# EAGLE board panel (EAGLE 5.11), part 1 of 2
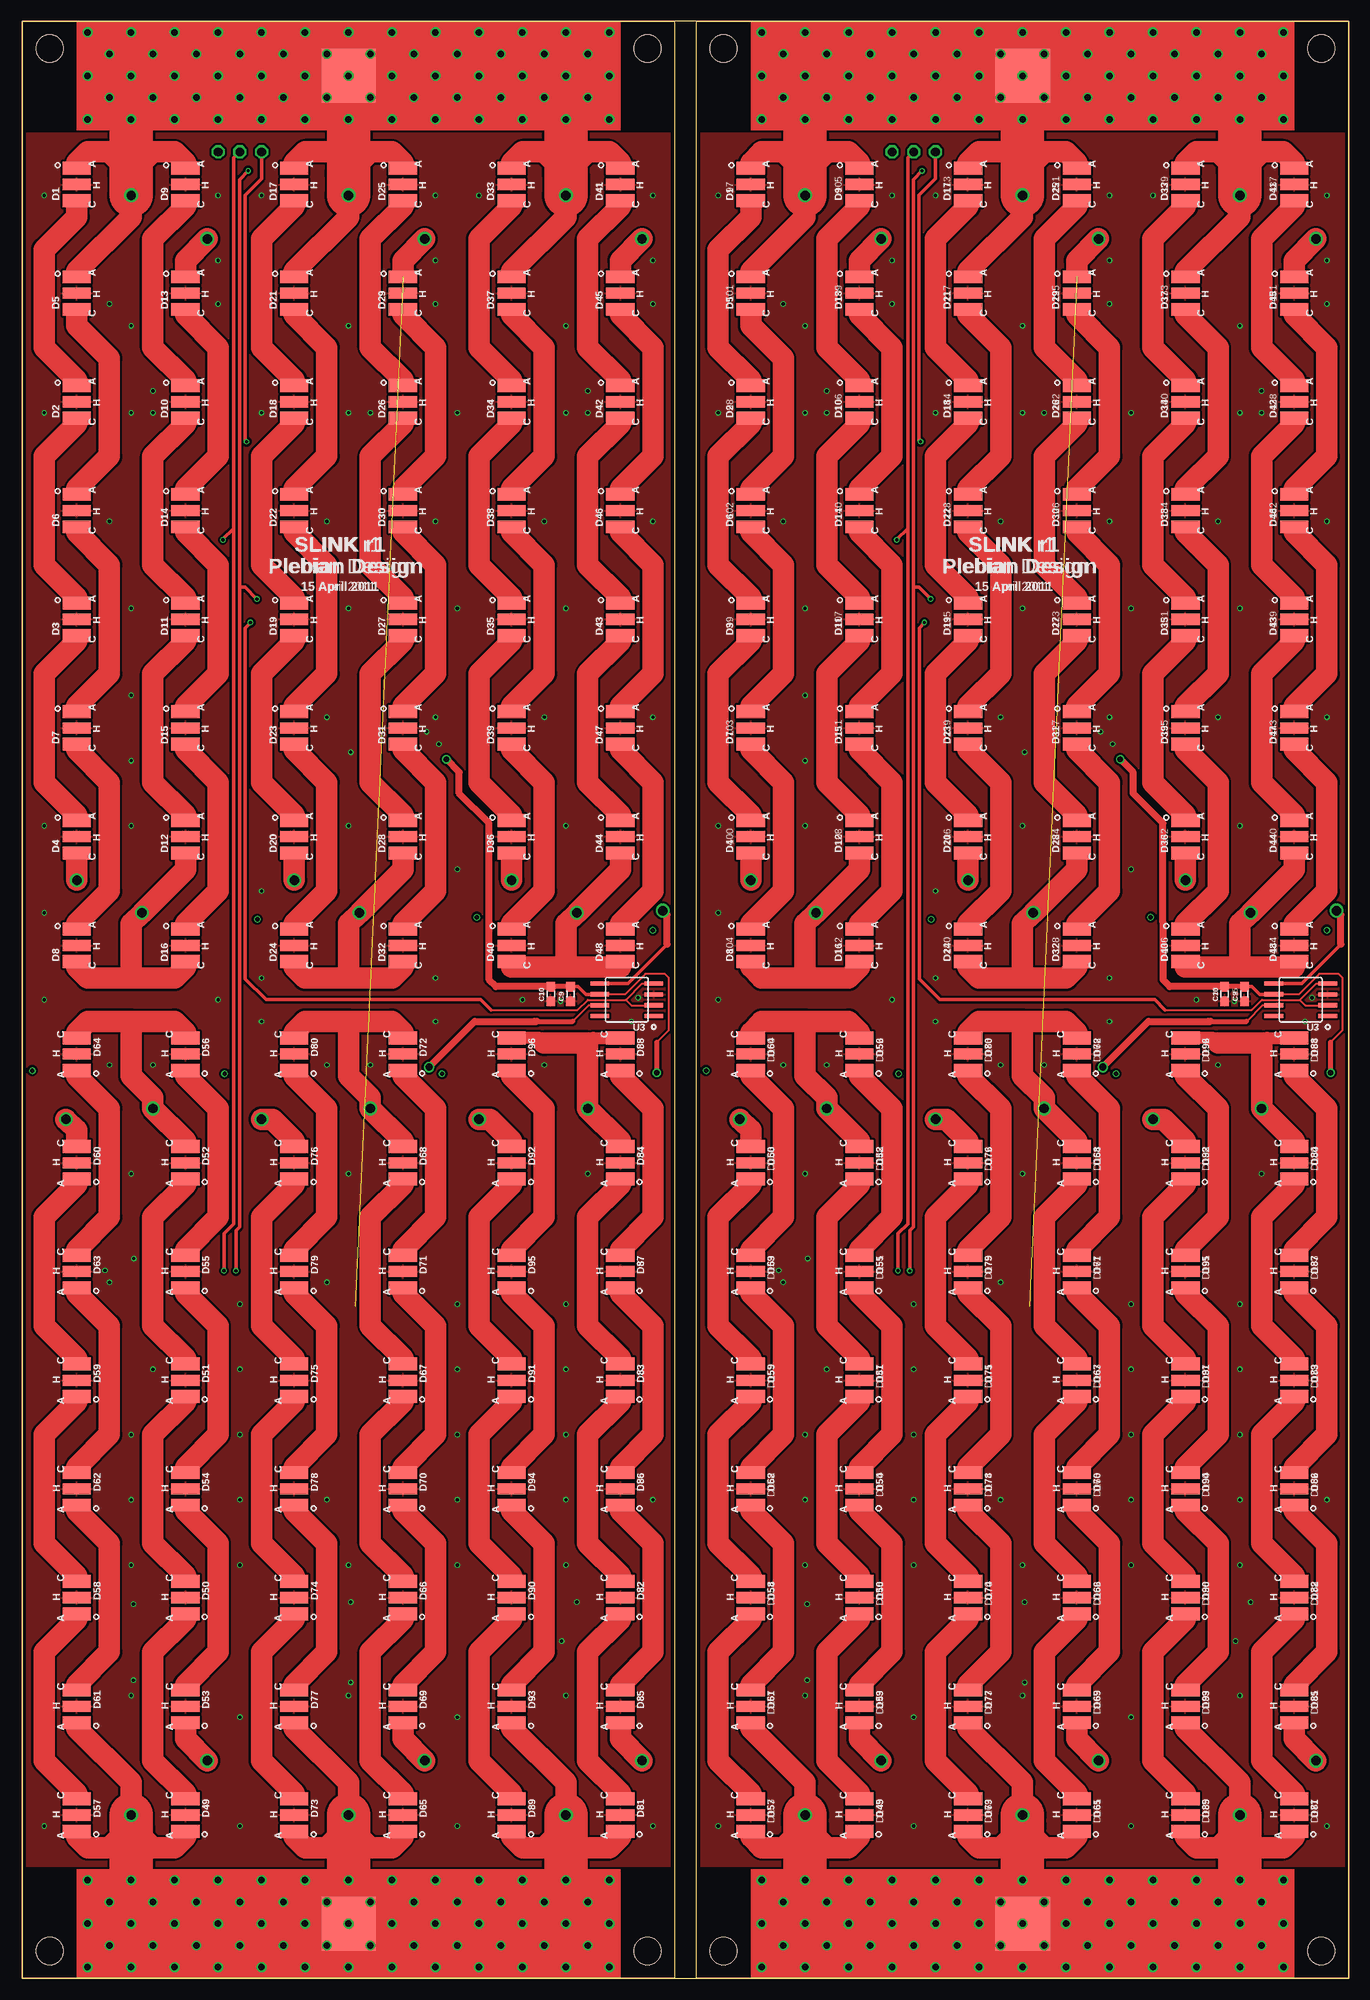
[diagram p0: board, top side]
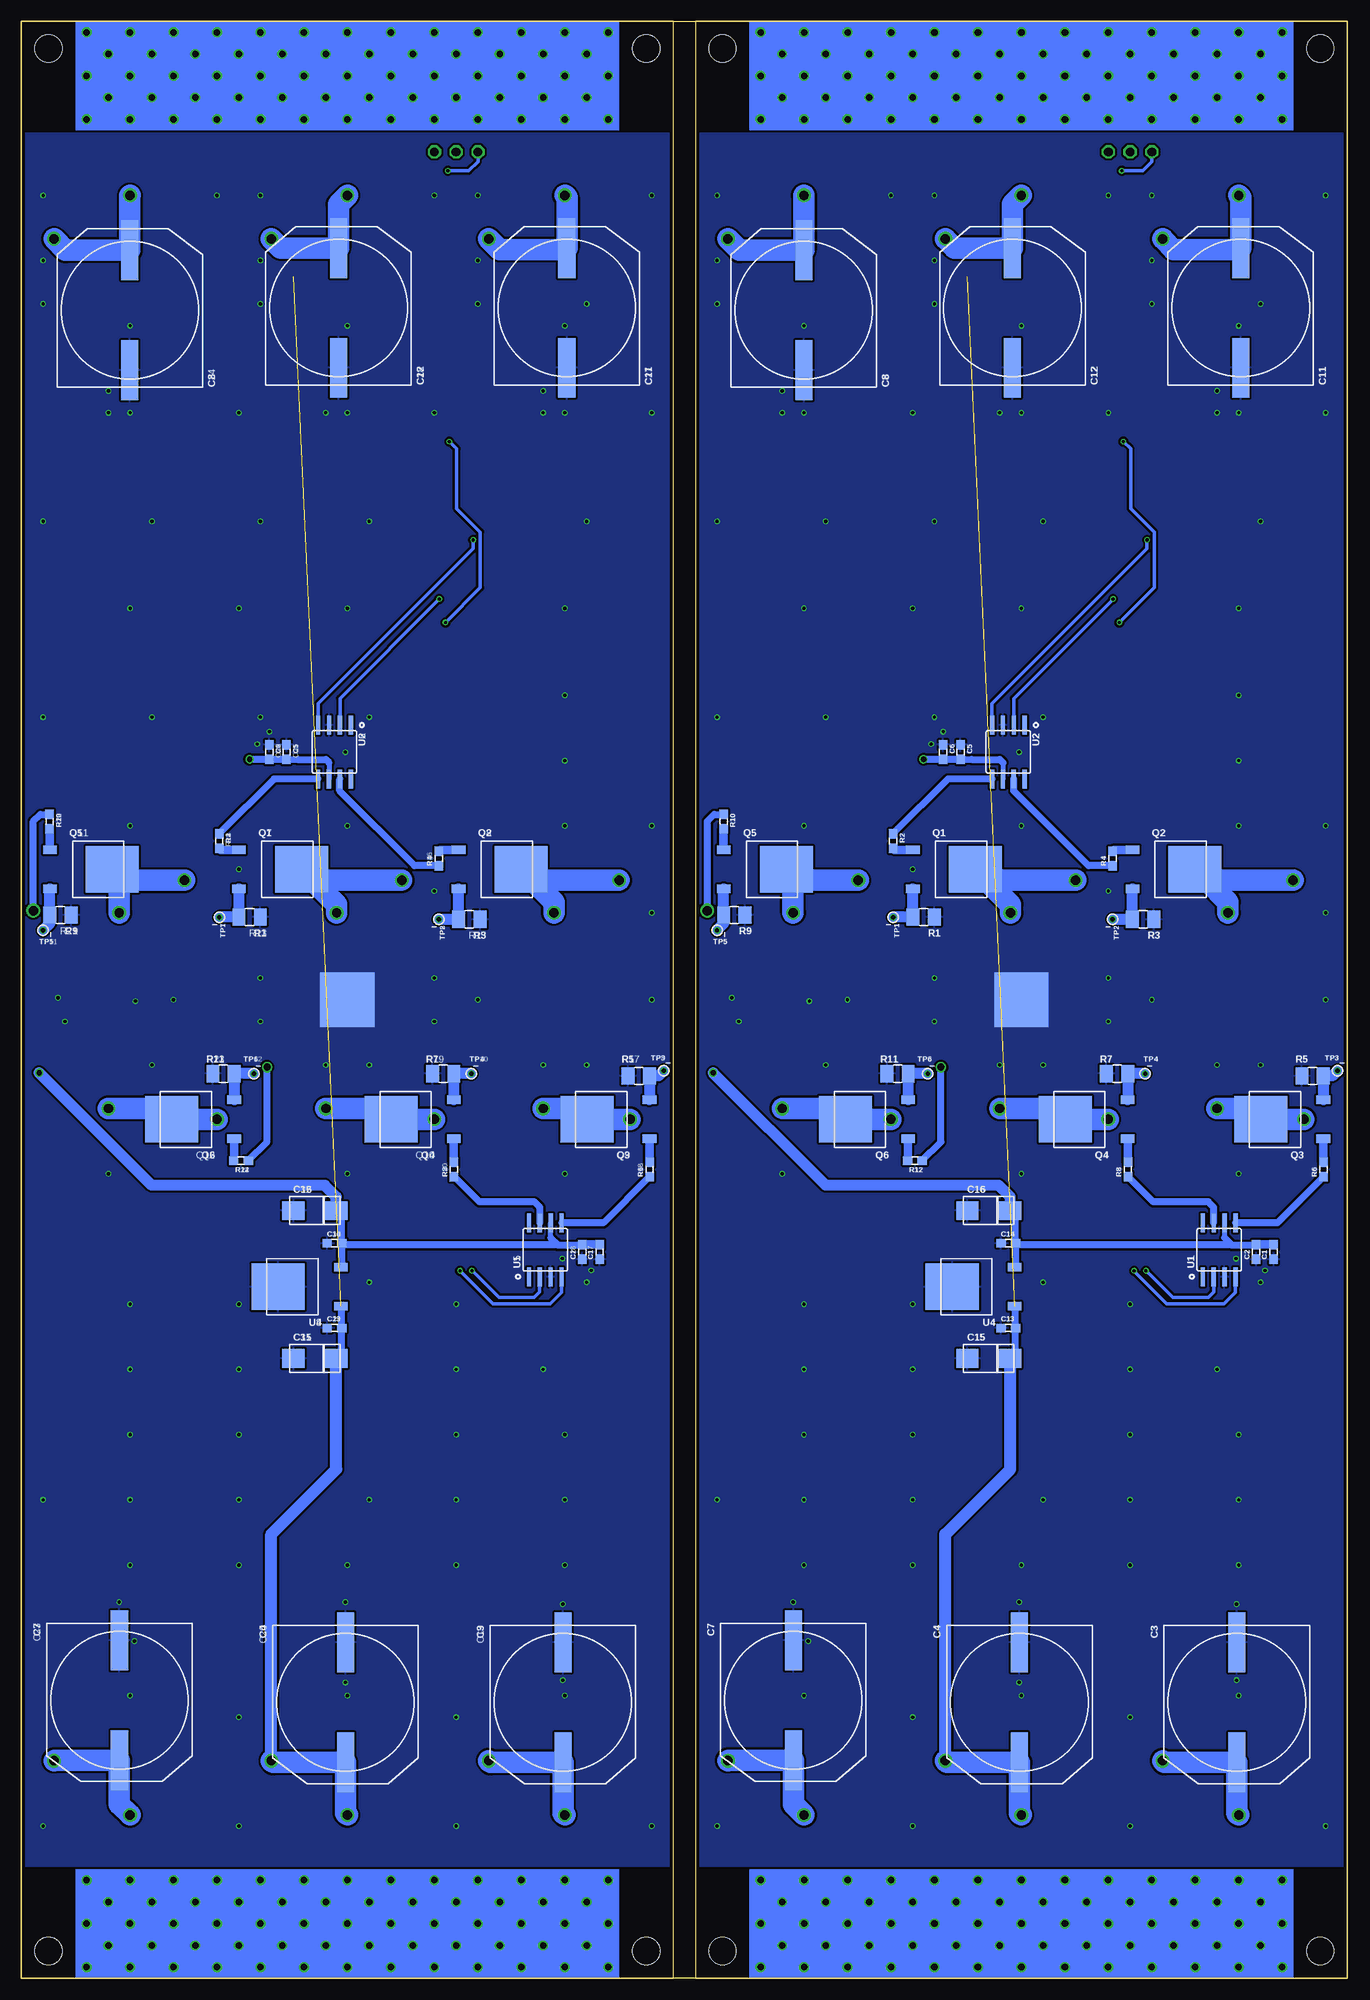
[diagram p1: board, bottom side, seen from below]

Size 154.94 x 228.6 mm. Coordinates in mm from the lower left corner, seen from the top.
Outline: 0,0 154.94,0 154.94,228.6 0,228.6 0,0
Copper layers (1*16): Top 0.0356mm / dielectric 1.5011mm / Bottom 0.0356mm
Design rules "33each": minimum track width 6mil, minimum drill 15mil, track to track 6mil, track to pad 6mil, pad to pad 6mil, via to via 6mil, smd to smd 6mil, copper to edge 15mil, drill to drill 10mil, minimum pad ring 5mil, minimum via ring 5mil, stop-mask expansion 4mil, vias tented up to drill 0mil, thermal gap 10mil

## Footprints (pad centres in the part's own frame; a part is rotated, then mirrored left to right if it is on the bottom)
BUSBAR = smd 6.35 x 6.35: 1 0,0 | drill 0.762 round: P$6 -30.48,0; P$7 -30.48,5.08; P$8 -30.48,-5.08; P$9 -27.94,2.54; P$10 -27.94,-2.54; P$11 -25.4,-5.08; P$12 -25.4,0; P$13 -25.4,5.08; P$14 -22.86,2.54; P$15 -22.86,-2.54; P$16 -20.32,5.08; P$17 -20.32,-5.08; P$18 -20.32,0; P$19 -17.78,2.54; P$20 -17.78,-2.54; P$21 -15.24,0; P$22 -15.24,5.08; P$23 -15.24,-5.08; P$24 -12.7,2.54; P$25 -12.7,-2.54; P$26 -10.16,-5.08; P$27 -10.16,0; P$28 -10.16,5.08; P$29 -7.62,2.54; P$30 -7.62,-2.54; P$31 -5.08,5.08; P$32 -5.08,-5.08; P$33 -5.08,0; P$34 -2.54,2.54; P$35 -2.54,-2.54; P$36 0,0; P$37 0,5.08; P$38 0,-5.08; P$39 2.54,2.54; P$40 2.54,-2.54; P$41 5.08,-5.08; P$42 5.08,0; P$43 5.08,5.08; P$44 7.62,2.54; P$45 7.62,-2.54; P$46 10.16,5.08; P$47 10.16,-5.08; P$48 10.16,0; P$49 12.7,2.54; P$50 12.7,-2.54; P$51 15.24,0; P$52 15.24,5.08; P$53 15.24,-5.08; P$54 17.78,2.54; P$55 17.78,-2.54; P$56 20.32,-5.08; P$57 20.32,0; P$58 20.32,5.08; P$59 22.86,2.54; P$60 22.86,-2.54; P$61 25.4,5.08; P$62 25.4,-5.08; P$63 25.4,0; P$64 27.94,2.54; P$65 27.94,-2.54; P$66 30.48,0; P$67 30.48,5.08; P$68 30.48,-5.08
BUSBAR-1LAYER = smd 6.35 x 6.35: 1 0,0
SMD0603 = smd 1.1 x 1: 1 -0.85,0; 2 0.85,0
EEV-FK-P16 = smd 7 x 2: 1 -10,-1.5; 2 4,-1.5
CT6032 = smd 2.6 x 2.2: + 2.5,0; - -2.5,0
XLAMP_XP-G = smd 1.5 x 3.3: A 1.898,0; C -1.898,0 | smd 1.3 x 3.3: HEAT 0,0
SINGLECHANNELSTROBE = hole 3.2: 3.175,-3.175; 73.025,-3.175; 3.175,-225.425; 73.025,-225.425
1X3 = drill 1.016 octagon: 1 0,2.54; 2 0,0; 3 0,-2.54
TO252 = smd 1 x 1.6: L -2.28,-4.8; R 2.28,-4.8 | smd 5.4 x 6.2: M 0,2.5
3.2X1.6MM = smd 1.5 x 2: 1 -1.25,0; 2 1.25,0
TP-HOLE = drill 0.508 round: 1 0,0
SOIC8 = smd 0.5 x 2.2: 1 -1.905,-3.154; 2 -0.645,-3.154; 3 0.625,-3.154; 4 1.895,-3.154; 5 1.905,3.154; 6 0.635,3.154; 7 -0.635,3.154; 8 -1.905,3.154

## Placement (x,y rotation side)
B1  TOP  [BUSBAR]  38.1,222.25 0 top
B2  BOTTOM  [BUSBAR]  38.1,6.35 0 top
B3  TOP  [BUSBAR-1LAYER]  38.1,114.3 0 bottom
B4  TOP  [BUSBAR]  116.84,222.25 0 top
B5  BOTTOM  [BUSBAR]  116.84,6.35 0 top
B6  TOP  [BUSBAR-1LAYER]  116.84,114.3 0 bottom
C1  0.1u  [SMD0603]  8.64,84.84 90 bottom
C2  1u  [SMD0603]  10.67,84.84 90 bottom
C3  C-FKP16  [EEV-FK-P16]  11.43,29.21 270 bottom
C4  C-FKP16  [EEV-FK-P16]  36.83,29.21 270 bottom
C5  0.1u  [SMD0603]  45.21,143.26 270 bottom
C6  1u  [SMD0603]  47.24,143.26 270 bottom
C7  C-FKP16  [EEV-FK-P16]  63.25,29.46 270 bottom
C8  C-FKP16  [EEV-FK-P16]  65.02,197.87 90 bottom
C9  0.1u  [SMD0603]  64.03,114.99 90 top
C10  1u  [SMD0603]  61.72,114.99 90 top
C11  C-FKP16  [EEV-FK-P16]  13.97,198.12 90 bottom
C12  C-FKP16  [EEV-FK-P16]  40.64,198.12 90 bottom
C13  1u  [SMD0603]  39.62,75.95 0 bottom
C14  1u  [SMD0603]  39.62,85.85 0 bottom
C15  10u  [CT6032]  41.91,72.39 0 bottom
C16  10u  [CT6032]  41.91,89.66 0 bottom
C17  0.1u  [SMD0603]  87.38,84.84 90 bottom
C18  1u  [SMD0603]  89.41,84.84 90 bottom
C19  C-FKP16  [EEV-FK-P16]  90.17,29.21 270 bottom
C20  C-FKP16  [EEV-FK-P16]  115.57,29.21 270 bottom
C21  0.1u  [SMD0603]  123.95,143.26 270 bottom
C22  1u  [SMD0603]  125.98,143.26 270 bottom
C23  C-FKP16  [EEV-FK-P16]  141.99,29.46 270 bottom
C24  C-FKP16  [EEV-FK-P16]  143.76,197.87 90 bottom
C25  0.1u  [SMD0603]  142.77,114.99 90 top
C26  1u  [SMD0603]  140.46,114.99 90 top
C27  C-FKP16  [EEV-FK-P16]  92.71,198.12 90 bottom
C28  C-FKP16  [EEV-FK-P16]  119.38,198.12 90 bottom
C29  1u  [SMD0603]  118.36,75.95 0 bottom
C30  1u  [SMD0603]  118.36,85.85 0 bottom
C31  10u  [CT6032]  120.65,72.39 0 bottom
C32  10u  [CT6032]  120.65,89.66 0 bottom
D1  XPGWHT  [XLAMP_XP-G]  6.35,209.55 90 top
D2  XPGWHT  [XLAMP_XP-G]  6.35,184.15 90 top
D3  XPGWHT  [XLAMP_XP-G]  6.35,158.75 90 top
D4  XPGWHT  [XLAMP_XP-G]  6.35,133.35 90 top
D5  XPGWHT  [XLAMP_XP-G]  6.35,196.85 90 top
D6  XPGWHT  [XLAMP_XP-G]  6.35,171.45 90 top
D7  XPGWHT  [XLAMP_XP-G]  6.35,146.05 90 top
D8  XPGWHT  [XLAMP_XP-G]  6.35,120.65 90 top
D9  XPGWHT  [XLAMP_XP-G]  19.05,209.55 90 top
D10  XPGWHT  [XLAMP_XP-G]  19.05,184.15 90 top
D11  XPGWHT  [XLAMP_XP-G]  19.05,158.75 90 top
D12  XPGWHT  [XLAMP_XP-G]  19.05,133.35 90 top
D13  XPGWHT  [XLAMP_XP-G]  19.05,196.85 90 top
D14  XPGWHT  [XLAMP_XP-G]  19.05,171.45 90 top
D15  XPGWHT  [XLAMP_XP-G]  19.05,146.05 90 top
D16  XPGWHT  [XLAMP_XP-G]  19.05,120.65 90 top
D17  XPGWHT  [XLAMP_XP-G]  31.75,209.55 90 top
D18  XPGWHT  [XLAMP_XP-G]  31.75,184.15 90 top
D19  XPGWHT  [XLAMP_XP-G]  31.75,158.75 90 top
D20  XPGWHT  [XLAMP_XP-G]  31.75,133.35 90 top
D21  XPGWHT  [XLAMP_XP-G]  31.75,196.85 90 top
D22  XPGWHT  [XLAMP_XP-G]  31.75,171.45 90 top
D23  XPGWHT  [XLAMP_XP-G]  31.75,146.05 90 top
D24  XPGWHT  [XLAMP_XP-G]  31.75,120.65 90 top
D25  XPGWHT  [XLAMP_XP-G]  44.45,209.55 90 top
D26  XPGWHT  [XLAMP_XP-G]  44.45,184.15 90 top
D27  XPGWHT  [XLAMP_XP-G]  44.45,158.75 90 top
D28  XPGWHT  [XLAMP_XP-G]  44.45,133.35 90 top
D29  XPGWHT  [XLAMP_XP-G]  44.45,196.85 90 top
D30  XPGWHT  [XLAMP_XP-G]  44.45,171.45 90 top
D31  XPGWHT  [XLAMP_XP-G]  44.45,146.05 90 top
D32  XPGWHT  [XLAMP_XP-G]  44.45,120.65 90 top
D33  XPGWHT  [XLAMP_XP-G]  57.15,209.55 90 top
D34  XPGWHT  [XLAMP_XP-G]  57.15,184.15 90 top
D35  XPGWHT  [XLAMP_XP-G]  57.15,158.75 90 top
D36  XPGWHT  [XLAMP_XP-G]  57.15,133.35 90 top
D37  XPGWHT  [XLAMP_XP-G]  57.15,196.85 90 top
D38  XPGWHT  [XLAMP_XP-G]  57.15,171.45 90 top
D39  XPGWHT  [XLAMP_XP-G]  57.15,146.05 90 top
D40  XPGWHT  [XLAMP_XP-G]  57.15,120.65 90 top
D41  XPGWHT  [XLAMP_XP-G]  69.85,209.55 90 top
D42  XPGWHT  [XLAMP_XP-G]  69.85,184.15 90 top
D43  XPGWHT  [XLAMP_XP-G]  69.85,158.75 90 top
D44  XPGWHT  [XLAMP_XP-G]  69.85,133.35 90 top
D45  XPGWHT  [XLAMP_XP-G]  69.85,196.85 90 top
D46  XPGWHT  [XLAMP_XP-G]  69.85,171.45 90 top
D47  XPGWHT  [XLAMP_XP-G]  69.85,146.05 90 top
D48  XPGWHT  [XLAMP_XP-G]  69.85,120.65 90 top
D49  XPGWHT  [XLAMP_XP-G]  19.05,19.05 270 top
D50  XPGWHT  [XLAMP_XP-G]  19.05,44.45 270 top
D51  XPGWHT  [XLAMP_XP-G]  19.05,69.85 270 top
D52  XPGWHT  [XLAMP_XP-G]  19.05,95.25 270 top
D53  XPGWHT  [XLAMP_XP-G]  19.05,31.75 270 top
D54  XPGWHT  [XLAMP_XP-G]  19.05,57.15 270 top
D55  XPGWHT  [XLAMP_XP-G]  19.05,82.55 270 top
D56  XPGWHT  [XLAMP_XP-G]  19.05,107.95 270 top
D57  XPGWHT  [XLAMP_XP-G]  6.35,19.05 270 top
D58  XPGWHT  [XLAMP_XP-G]  6.35,44.45 270 top
D59  XPGWHT  [XLAMP_XP-G]  6.35,69.85 270 top
D60  XPGWHT  [XLAMP_XP-G]  6.35,95.25 270 top
D61  XPGWHT  [XLAMP_XP-G]  6.35,31.75 270 top
D62  XPGWHT  [XLAMP_XP-G]  6.35,57.15 270 top
D63  XPGWHT  [XLAMP_XP-G]  6.35,82.55 270 top
D64  XPGWHT  [XLAMP_XP-G]  6.35,107.95 270 top
D65  XPGWHT  [XLAMP_XP-G]  44.45,19.05 270 top
D66  XPGWHT  [XLAMP_XP-G]  44.45,44.45 270 top
D67  XPGWHT  [XLAMP_XP-G]  44.45,69.85 270 top
D68  XPGWHT  [XLAMP_XP-G]  44.45,95.25 270 top
D69  XPGWHT  [XLAMP_XP-G]  44.45,31.75 270 top
D70  XPGWHT  [XLAMP_XP-G]  44.45,57.15 270 top
D71  XPGWHT  [XLAMP_XP-G]  44.45,82.55 270 top
D72  XPGWHT  [XLAMP_XP-G]  44.45,107.95 270 top
D73  XPGWHT  [XLAMP_XP-G]  31.75,19.05 270 top
D74  XPGWHT  [XLAMP_XP-G]  31.75,44.45 270 top
D75  XPGWHT  [XLAMP_XP-G]  31.75,69.85 270 top
D76  XPGWHT  [XLAMP_XP-G]  31.75,95.25 270 top
D77  XPGWHT  [XLAMP_XP-G]  31.75,31.75 270 top
D78  XPGWHT  [XLAMP_XP-G]  31.75,57.15 270 top
D79  XPGWHT  [XLAMP_XP-G]  31.75,82.55 270 top
D80  XPGWHT  [XLAMP_XP-G]  31.75,107.95 270 top
D81  XPGWHT  [XLAMP_XP-G]  69.85,19.05 270 top
D82  XPGWHT  [XLAMP_XP-G]  69.85,44.45 270 top
D83  XPGWHT  [XLAMP_XP-G]  69.85,69.85 270 top
D84  XPGWHT  [XLAMP_XP-G]  69.85,95.25 270 top
D85  XPGWHT  [XLAMP_XP-G]  69.85,31.75 270 top
D86  XPGWHT  [XLAMP_XP-G]  69.85,57.15 270 top
D87  XPGWHT  [XLAMP_XP-G]  69.85,82.55 270 top
D88  XPGWHT  [XLAMP_XP-G]  69.85,107.95 270 top
D89  XPGWHT  [XLAMP_XP-G]  57.15,19.05 270 top
D90  XPGWHT  [XLAMP_XP-G]  57.15,44.45 270 top
D91  XPGWHT  [XLAMP_XP-G]  57.15,69.85 270 top
D92  XPGWHT  [XLAMP_XP-G]  57.15,95.25 270 top
D93  XPGWHT  [XLAMP_XP-G]  57.15,31.75 270 top
D94  XPGWHT  [XLAMP_XP-G]  57.15,57.15 270 top
D95  XPGWHT  [XLAMP_XP-G]  57.15,82.55 270 top
D96  XPGWHT  [XLAMP_XP-G]  57.15,107.95 270 top
D97  XPGWHT  [XLAMP_XP-G]  85.09,209.55 90 top
D98  XPGWHT  [XLAMP_XP-G]  85.09,184.15 90 top
D99  XPGWHT  [XLAMP_XP-G]  85.09,158.75 90 top
D100  XPGWHT  [XLAMP_XP-G]  85.09,133.35 90 top
D101  XPGWHT  [XLAMP_XP-G]  85.09,196.85 90 top
D102  XPGWHT  [XLAMP_XP-G]  85.09,171.45 90 top
D103  XPGWHT  [XLAMP_XP-G]  85.09,146.05 90 top
D104  XPGWHT  [XLAMP_XP-G]  85.09,120.65 90 top
D105  XPGWHT  [XLAMP_XP-G]  97.79,209.55 90 top
D106  XPGWHT  [XLAMP_XP-G]  97.79,184.15 90 top
D107  XPGWHT  [XLAMP_XP-G]  97.79,158.75 90 top
D108  XPGWHT  [XLAMP_XP-G]  97.79,133.35 90 top
D109  XPGWHT  [XLAMP_XP-G]  97.79,196.85 90 top
D110  XPGWHT  [XLAMP_XP-G]  97.79,171.45 90 top
D111  XPGWHT  [XLAMP_XP-G]  97.79,146.05 90 top
D112  XPGWHT  [XLAMP_XP-G]  97.79,120.65 90 top
D113  XPGWHT  [XLAMP_XP-G]  110.49,209.55 90 top
D114  XPGWHT  [XLAMP_XP-G]  110.49,184.15 90 top
D115  XPGWHT  [XLAMP_XP-G]  110.49,158.75 90 top
D116  XPGWHT  [XLAMP_XP-G]  110.49,133.35 90 top
D117  XPGWHT  [XLAMP_XP-G]  110.49,196.85 90 top
D118  XPGWHT  [XLAMP_XP-G]  110.49,171.45 90 top
D119  XPGWHT  [XLAMP_XP-G]  110.49,146.05 90 top
D120  XPGWHT  [XLAMP_XP-G]  110.49,120.65 90 top
D121  XPGWHT  [XLAMP_XP-G]  123.19,209.55 90 top
D122  XPGWHT  [XLAMP_XP-G]  123.19,184.15 90 top
D123  XPGWHT  [XLAMP_XP-G]  123.19,158.75 90 top
D124  XPGWHT  [XLAMP_XP-G]  123.19,133.35 90 top
D125  XPGWHT  [XLAMP_XP-G]  123.19,196.85 90 top
D126  XPGWHT  [XLAMP_XP-G]  123.19,171.45 90 top
D127  XPGWHT  [XLAMP_XP-G]  123.19,146.05 90 top
D128  XPGWHT  [XLAMP_XP-G]  123.19,120.65 90 top
D129  XPGWHT  [XLAMP_XP-G]  135.89,209.55 90 top
D130  XPGWHT  [XLAMP_XP-G]  135.89,184.15 90 top
D131  XPGWHT  [XLAMP_XP-G]  135.89,158.75 90 top
D132  XPGWHT  [XLAMP_XP-G]  135.89,133.35 90 top
D133  XPGWHT  [XLAMP_XP-G]  135.89,196.85 90 top
D134  XPGWHT  [XLAMP_XP-G]  135.89,171.45 90 top
D135  XPGWHT  [XLAMP_XP-G]  135.89,146.05 90 top
D136  XPGWHT  [XLAMP_XP-G]  135.89,120.65 90 top
D137  XPGWHT  [XLAMP_XP-G]  148.59,209.55 90 top
D138  XPGWHT  [XLAMP_XP-G]  148.59,184.15 90 top
D139  XPGWHT  [XLAMP_XP-G]  148.59,158.75 90 top
D140  XPGWHT  [XLAMP_XP-G]  148.59,133.35 90 top
D141  XPGWHT  [XLAMP_XP-G]  148.59,196.85 90 top
D142  XPGWHT  [XLAMP_XP-G]  148.59,171.45 90 top
D143  XPGWHT  [XLAMP_XP-G]  148.59,146.05 90 top
D144  XPGWHT  [XLAMP_XP-G]  148.59,120.65 90 top
D145  XPGWHT  [XLAMP_XP-G]  97.79,19.05 270 top
D146  XPGWHT  [XLAMP_XP-G]  97.79,44.45 270 top
D147  XPGWHT  [XLAMP_XP-G]  97.79,69.85 270 top
D148  XPGWHT  [XLAMP_XP-G]  97.79,95.25 270 top
D149  XPGWHT  [XLAMP_XP-G]  97.79,31.75 270 top
D150  XPGWHT  [XLAMP_XP-G]  97.79,57.15 270 top
D151  XPGWHT  [XLAMP_XP-G]  97.79,82.55 270 top
D152  XPGWHT  [XLAMP_XP-G]  97.79,107.95 270 top
D153  XPGWHT  [XLAMP_XP-G]  85.09,19.05 270 top
D154  XPGWHT  [XLAMP_XP-G]  85.09,44.45 270 top
D155  XPGWHT  [XLAMP_XP-G]  85.09,69.85 270 top
D156  XPGWHT  [XLAMP_XP-G]  85.09,95.25 270 top
D157  XPGWHT  [XLAMP_XP-G]  85.09,31.75 270 top
D158  XPGWHT  [XLAMP_XP-G]  85.09,57.15 270 top
D159  XPGWHT  [XLAMP_XP-G]  85.09,82.55 270 top
D160  XPGWHT  [XLAMP_XP-G]  85.09,107.95 270 top
D161  XPGWHT  [XLAMP_XP-G]  123.19,19.05 270 top
D162  XPGWHT  [XLAMP_XP-G]  123.19,44.45 270 top
D163  XPGWHT  [XLAMP_XP-G]  123.19,69.85 270 top
D164  XPGWHT  [XLAMP_XP-G]  123.19,95.25 270 top
D165  XPGWHT  [XLAMP_XP-G]  123.19,31.75 270 top
D166  XPGWHT  [XLAMP_XP-G]  123.19,57.15 270 top
D167  XPGWHT  [XLAMP_XP-G]  123.19,82.55 270 top
D168  XPGWHT  [XLAMP_XP-G]  123.19,107.95 270 top
D169  XPGWHT  [XLAMP_XP-G]  110.49,19.05 270 top
D170  XPGWHT  [XLAMP_XP-G]  110.49,44.45 270 top
D171  XPGWHT  [XLAMP_XP-G]  110.49,69.85 270 top
D172  XPGWHT  [XLAMP_XP-G]  110.49,95.25 270 top
D173  XPGWHT  [XLAMP_XP-G]  110.49,31.75 270 top
D174  XPGWHT  [XLAMP_XP-G]  110.49,57.15 270 top
D175  XPGWHT  [XLAMP_XP-G]  110.49,82.55 270 top
D176  XPGWHT  [XLAMP_XP-G]  110.49,107.95 270 top
D177  XPGWHT  [XLAMP_XP-G]  148.59,19.05 270 top
D178  XPGWHT  [XLAMP_XP-G]  148.59,44.45 270 top
D179  XPGWHT  [XLAMP_XP-G]  148.59,69.85 270 top
D180  XPGWHT  [XLAMP_XP-G]  148.59,95.25 270 top
D181  XPGWHT  [XLAMP_XP-G]  148.59,31.75 270 top
D182  XPGWHT  [XLAMP_XP-G]  148.59,57.15 270 top
D183  XPGWHT  [XLAMP_XP-G]  148.59,82.55 270 top
D184  XPGWHT  [XLAMP_XP-G]  148.59,107.95 270 top
D185  XPGWHT  [XLAMP_XP-G]  135.89,19.05 270 top
D186  XPGWHT  [XLAMP_XP-G]  135.89,44.45 270 top
D187  XPGWHT  [XLAMP_XP-G]  135.89,69.85 270 top
D188  XPGWHT  [XLAMP_XP-G]  135.89,95.25 270 top
D189  XPGWHT  [XLAMP_XP-G]  135.89,31.75 270 top
D190  XPGWHT  [XLAMP_XP-G]  135.89,57.15 270 top
D191  XPGWHT  [XLAMP_XP-G]  135.89,82.55 270 top
D192  XPGWHT  [XLAMP_XP-G]  135.89,107.95 270 top
FORMFACTOR1  FORMFACTOR  [SINGLECHANNELSTROBE]  0,228.6 0 top
FORMFACTOR2  FORMFACTOR  [SINGLECHANNELSTROBE]  78.74,228.6 0 top
JP1  [1X3]  25.4,213.36 90 top
JP2  [1X3]  104.14,213.36 90 top
Q1  AOD4184A  [TO252]  45.97,129.54 270 bottom
Q2  AOD4184A  [TO252]  20.32,129.54 270 bottom
Q3  AOD4184A  [TO252]  7.62,100.33 90 bottom
Q4  AOD4184A  [TO252]  30.48,100.33 90 bottom
Q5  AOD4184A  [TO252]  68.07,129.54 270 bottom
Q6  AOD4184A  [TO252]  56.13,100.33 90 bottom
Q7  AOD4184A  [TO252]  124.71,129.54 270 bottom
Q8  AOD4184A  [TO252]  99.06,129.54 270 bottom
Q9  AOD4184A  [TO252]  86.36,100.33 90 bottom
Q10  AOD4184A  [TO252]  109.22,100.33 90 bottom
Q11  AOD4184A  [TO252]  146.81,129.54 270 bottom
Q12  AOD4184A  [TO252]  134.87,100.33 90 bottom
R1  0.010  [3.2X1.6MM]  49.53,123.95 180 bottom
R2  [SMD0603]  53.09,132.84 270 bottom
R3  0.010  [3.2X1.6MM]  23.88,123.7 180 bottom
R4  [SMD0603]  27.43,130.81 90 bottom
R5  0.010  [3.2X1.6MM]  4.06,105.41 0 bottom
R6  [SMD0603]  2.79,94.49 90 bottom
R7  0.010  [3.2X1.6MM]  26.92,105.66 0 bottom
R8  [SMD0603]  25.65,94.49 90 bottom
R9  0.010  [3.2X1.6MM]  71.63,124.21 180 bottom
R10  [SMD0603]  72.9,135.13 270 bottom
R11  0.010  [3.2X1.6MM]  52.58,105.66 0 bottom
R12  [SMD0603]  50.55,95.5 180 bottom
R13  0.010  [3.2X1.6MM]  128.27,123.95 180 bottom
R14  [SMD0603]  131.83,132.84 270 bottom
R15  0.010  [3.2X1.6MM]  102.62,123.7 180 bottom
R16  [SMD0603]  106.17,130.81 90 bottom
R17  0.010  [3.2X1.6MM]  82.8,105.41 0 bottom
R18  [SMD0603]  81.53,94.49 90 bottom
R19  0.010  [3.2X1.6MM]  105.66,105.66 0 bottom
R20  [SMD0603]  104.39,94.49 90 bottom
R21  0.010  [3.2X1.6MM]  150.37,124.21 180 bottom
R22  [SMD0603]  151.64,135.13 270 bottom
R23  0.010  [3.2X1.6MM]  131.32,105.66 0 bottom
R24  [SMD0603]  129.29,95.5 180 bottom
TP1  I  [TP-HOLE]  53.09,123.95 270 bottom
TP2  I  [TP-HOLE]  27.43,123.7 270 bottom
TP3  I  [TP-HOLE]  1.14,106.02 90 bottom
TP4  I  [TP-HOLE]  23.62,105.66 90 bottom
TP5  I  [TP-HOLE]  73.66,122.43 0 bottom
TP6  I  [TP-HOLE]  49.02,105.66 90 bottom
TP7  I  [TP-HOLE]  131.83,123.95 270 bottom
TP8  I  [TP-HOLE]  106.17,123.7 270 bottom
TP9  I  [TP-HOLE]  79.88,106.02 90 bottom
TP10  I  [TP-HOLE]  102.36,105.66 90 bottom
TP11  I  [TP-HOLE]  152.4,122.43 0 bottom
TP12  I  [TP-HOLE]  127.76,105.66 90 bottom
U1  TC4427  [SOIC8]  14.99,85.09 0 bottom
U2  TC4427  [SOIC8]  39.62,143.26 180 bottom
U3  TC4427  [SOIC8]  70.61,114.3 90 top
U4  MC78MDT  [TO252]  43.69,80.77 90 bottom
U5  TC4427  [SOIC8]  93.73,85.09 0 bottom
U6  TC4427  [SOIC8]  118.36,143.26 180 bottom
U7  TC4427  [SOIC8]  149.35,114.3 90 top
U8  MC78MDT  [TO252]  122.43,80.77 90 bottom

## Library data of the parts
B1-B6 C1-C32 D1-D192 JP1 JP2 Q1-Q12 R1-R24 TP1-TP12 U1-U8 = parts
FORMFACTOR1 FORMFACTOR2 = parts-mar

## Nets
12V0: C1.2 C2.2 C5.2 C6.2 C9.2 C10.2 C14.2 C16.+ U1.6 U2.6 U3.6 U4.R
12V1: C17.2 C18.2 C21.2 C22.2 C25.2 C26.2 C30.2 C32.+ U5.6 U6.6 U7.6 U8.R
G1: JP1.1 U1.4 U2.2
G2: JP1.2 U1.2 U2.4
G3: JP1.3 U3.2 U3.4
G4: JP2.2 U5.2 U6.4
G5: JP2.1 U5.4 U6.2
G6: JP2.3 U7.2 U7.4
GND: B3.1 C1.1 C2.1 C3.1 C4.1 C5.1 C6.1 C7.1 C8.1 C9.1 C10.1 C11.1 C12.1 C13.1 C14.1 C15.- C16.- D1.HEAT D2.HEAT D3.HEAT D4.HEAT D5.HEAT D6.HEAT D7.HEAT D8.HEAT D9.HEAT D10.HEAT D11.HEAT D12.HEAT D13.HEAT D14.HEAT D15.HEAT D16.HEAT D17.HEAT D18.HEAT D19.HEAT D20.HEAT D21.HEAT D22.HEAT D23.HEAT D24.HEAT D25.HEAT D26.HEAT D27.HEAT D28.HEAT D29.HEAT D30.HEAT D31.HEAT D32.HEAT D33.HEAT D34.HEAT D35.HEAT D36.HEAT D37.HEAT D38.HEAT D39.HEAT D40.HEAT D41.HEAT D42.HEAT D43.HEAT D44.HEAT D45.HEAT D46.HEAT D47.HEAT D48.HEAT D49.HEAT D50.HEAT D51.HEAT D52.HEAT D53.HEAT D54.HEAT D55.HEAT D56.HEAT D57.HEAT D58.HEAT D59.HEAT D60.HEAT D61.HEAT D62.HEAT D63.HEAT D64.HEAT D65.HEAT D66.HEAT D67.HEAT D68.HEAT D69.HEAT D70.HEAT D71.HEAT D72.HEAT D73.HEAT D74.HEAT D75.HEAT D76.HEAT D77.HEAT D78.HEAT D79.HEAT D80.HEAT D81.HEAT D82.HEAT D83.HEAT D84.HEAT D85.HEAT D86.HEAT D87.HEAT D88.HEAT D89.HEAT D90.HEAT D91.HEAT D92.HEAT D93.HEAT D94.HEAT D95.HEAT D96.HEAT R1.1 R3.1 R5.1 R7.1 R9.1 R11.1 U1.3 U2.3 U3.3 U4.M
GND1: B6.1 C17.1 C18.1 C19.1 C20.1 C21.1 C22.1 C23.1 C24.1 C25.1 C26.1 C27.1 C28.1 C29.1 C30.1 C31.- C32.- D97.HEAT D98.HEAT D99.HEAT D100.HEAT D101.HEAT D102.HEAT D103.HEAT D104.HEAT D105.HEAT D106.HEAT D107.HEAT D108.HEAT D109.HEAT D110.HEAT D111.HEAT D112.HEAT D113.HEAT D114.HEAT D115.HEAT D116.HEAT D117.HEAT D118.HEAT D119.HEAT D120.HEAT D121.HEAT D122.HEAT D123.HEAT D124.HEAT D125.HEAT D126.HEAT D127.HEAT D128.HEAT D129.HEAT D130.HEAT D131.HEAT D132.HEAT D133.HEAT D134.HEAT D135.HEAT D136.HEAT D137.HEAT D138.HEAT D139.HEAT D140.HEAT D141.HEAT D142.HEAT D143.HEAT D144.HEAT D145.HEAT D146.HEAT D147.HEAT D148.HEAT D149.HEAT D150.HEAT D151.HEAT D152.HEAT D153.HEAT D154.HEAT D155.HEAT D156.HEAT D157.HEAT D158.HEAT D159.HEAT D160.HEAT D161.HEAT D162.HEAT D163.HEAT D164.HEAT D165.HEAT D166.HEAT D167.HEAT D168.HEAT D169.HEAT D170.HEAT D171.HEAT D172.HEAT D173.HEAT D174.HEAT D175.HEAT D176.HEAT D177.HEAT D178.HEAT D179.HEAT D180.HEAT D181.HEAT D182.HEAT D183.HEAT D184.HEAT D185.HEAT D186.HEAT D187.HEAT D188.HEAT D189.HEAT D190.HEAT D191.HEAT D192.HEAT R13.1 R15.1 R17.1 R19.1 R21.1 R23.1 U5.3 U6.3 U7.3 U8.M
GRP1: D20.C D24.C D28.C D32.C Q1.M
GRP2: D4.C D8.C D12.C D16.C Q2.M
GRP3: D52.C D56.C D60.C D64.C Q3.M
GRP4: D68.C D72.C D76.C D80.C Q4.M
GRP5: D36.C D40.C D44.C D48.C Q5.M
GRP6: D84.C D88.C D92.C D96.C Q6.M
GRP7: D116.C D120.C D124.C D128.C Q7.M
GRP8: D148.C D152.C D156.C D160.C Q9.M
GRP9: D164.C D168.C D172.C D176.C Q10.M
GRP10: D132.C D136.C D140.C D144.C Q11.M
GRP11: D180.C D184.C D188.C D192.C Q12.M
GRP12: D100.C D104.C D108.C D112.C Q8.M
N$1: D1.C D2.A
N$2: D2.C D3.A
N$3: D3.C D4.A
N$4: D5.C D6.A
N$5: D6.C D7.A
N$6: D7.C D8.A
N$7: D9.C D10.A
N$8: D10.C D11.A
N$9: D11.C D12.A
N$10: D13.C D14.A
N$11: D14.C D15.A
N$12: D15.C D16.A
N$13: D17.C D18.A
N$14: D18.C D19.A
N$15: D19.C D20.A
N$16: D21.C D22.A
N$17: D22.C D23.A
N$18: D23.C D24.A
N$19: D25.C D26.A
N$20: D26.C D27.A
N$21: D27.C D28.A
N$22: D29.C D30.A
N$23: D30.C D31.A
N$24: D31.C D32.A
N$25: D33.C D34.A
N$26: D34.C D35.A
N$27: D35.C D36.A
N$28: D37.C D38.A
N$29: D38.C D39.A
N$30: D39.C D40.A
N$31: D41.C D42.A
N$32: D42.C D43.A
N$33: D43.C D44.A
N$34: D45.C D46.A
N$35: D46.C D47.A
N$36: D47.C D48.A
N$37: D49.C D50.A
N$38: D50.C D51.A
N$39: D51.C D52.A
N$40: D53.C D54.A
N$41: D54.C D55.A
N$42: D55.C D56.A
N$43: D57.C D58.A
N$44: D58.C D59.A
N$45: D59.C D60.A
N$46: D61.C D62.A
N$47: D62.C D63.A
N$48: D63.C D64.A
N$49: D65.C D66.A
N$50: D66.C D67.A
N$51: D67.C D68.A
N$52: D69.C D70.A
N$53: D70.C D71.A
N$54: D71.C D72.A
N$55: D73.C D74.A
N$56: D74.C D75.A
N$57: D75.C D76.A
N$58: D77.C D78.A
N$59: D78.C D79.A
N$60: D79.C D80.A
N$61: D81.C D82.A
N$62: D82.C D83.A
N$63: D83.C D84.A
N$64: D85.C D86.A
N$65: D86.C D87.A
N$66: D87.C D88.A
N$67: D89.C D90.A
N$68: D90.C D91.A
N$69: D91.C D92.A
N$70: D93.C D94.A
N$71: D94.C D95.A
N$72: D95.C D96.A
N$73: Q1.R R1.2 TP1.1
N$74: Q1.L R2.2
N$75: R2.1 U2.5
N$76: D97.C D98.A
N$77: D98.C D99.A
N$78: D99.C D100.A
N$79: Q2.R R3.2 TP2.1
N$80: Q2.L R4.2
N$81: R4.1 U2.7
N$82: D101.C D102.A
N$83: D102.C D103.A
N$84: D103.C D104.A
N$85: Q3.R R5.2 TP3.1
N$86: Q3.L R6.2
N$87: R6.1 U1.5
N$88: D105.C D106.A
N$89: D106.C D107.A
N$90: D107.C D108.A
N$91: Q4.R R7.2 TP4.1
N$92: Q4.L R8.2
N$93: R8.1 U1.7
N$94: D109.C D110.A
N$95: D110.C D111.A
N$96: D111.C D112.A
N$97: Q5.R R9.2 TP5.1
N$98: Q5.L R10.2
N$99: R10.1 U3.5
N$100: D113.C D114.A
N$101: D114.C D115.A
N$102: D115.C D116.A
N$103: Q6.R R11.2 TP6.1
N$104: Q6.L R12.2
N$105: R12.1 U3.7
N$106: D117.C D118.A
N$107: D118.C D119.A
N$108: D119.C D120.A
N$109: D121.C D122.A
N$110: D122.C D123.A
N$111: D123.C D124.A
N$112: D125.C D126.A
N$113: D126.C D127.A
N$114: D127.C D128.A
N$115: D129.C D130.A
N$116: D130.C D131.A
N$117: D131.C D132.A
N$118: D133.C D134.A
N$119: D134.C D135.A
N$120: D135.C D136.A
N$121: D137.C D138.A
N$122: D138.C D139.A
N$123: D139.C D140.A
N$124: D141.C D142.A
N$125: D142.C D143.A
N$126: D143.C D144.A
N$127: D145.C D146.A
N$128: D146.C D147.A
N$129: D147.C D148.A
N$130: D149.C D150.A
N$131: D150.C D151.A
N$132: D151.C D152.A
N$133: D153.C D154.A
N$134: D154.C D155.A
N$135: D155.C D156.A
N$136: D157.C D158.A
N$137: D158.C D159.A
N$138: D159.C D160.A
N$139: D161.C D162.A
N$140: D162.C D163.A
N$141: D163.C D164.A
N$142: D165.C D166.A
N$143: D166.C D167.A
N$144: D167.C D168.A
N$145: D169.C D170.A
N$146: D170.C D171.A
N$147: D171.C D172.A
N$148: D173.C D174.A
N$149: D174.C D175.A
N$150: D175.C D176.A
N$151: D177.C D178.A
N$152: D178.C D179.A
N$153: D179.C D180.A
N$154: D181.C D182.A
N$155: D182.C D183.A
N$156: D183.C D184.A
N$157: D185.C D186.A
N$158: D186.C D187.A
N$159: D187.C D188.A
N$160: D189.C D190.A
N$161: D190.C D191.A
N$162: D191.C D192.A
N$163: Q7.R R13.2 TP7.1
N$164: Q7.L R14.2
N$165: R14.1 U6.5
N$166: Q8.R R15.2 TP8.1
N$167: Q8.L R16.2
N$168: R16.1 U6.7
N$169: Q9.R R17.2 TP9.1
N$170: Q9.L R18.2
N$171: R18.1 U5.5
N$172: Q10.R R19.2 TP10.1
N$173: Q10.L R20.2
N$174: R20.1 U5.7
N$175: Q11.R R21.2 TP11.1
N$176: Q11.L R22.2
N$177: R22.1 U7.5
N$178: Q12.R R23.2 TP12.1
N$179: Q12.L R24.2
N$180: R24.1 U7.7
VLED: B1.1 B2.1 C3.2 C4.2 C7.2 C8.2 C11.2 C12.2 C13.2 C15.+ D1.A D5.A D9.A D13.A D17.A D21.A D25.A D29.A D33.A D37.A D41.A D45.A D49.A D53.A D57.A D61.A D65.A D69.A D73.A D77.A D81.A D85.A D89.A D93.A U4.L
VLED1: B4.1 B5.1 C19.2 C20.2 C23.2 C24.2 C27.2 C28.2 C29.2 C31.+ D97.A D101.A D105.A D109.A D113.A D117.A D121.A D125.A D129.A D133.A D137.A D141.A D145.A D149.A D153.A D157.A D161.A D165.A D169.A D173.A D177.A D181.A D185.A D189.A U8.L